# Altium PCB PCB_BLDC_DRV_Havoc_utlis_2025-07-22.pcbdoc (part 1 of 2)
Units mm, origin at the board's own origin, x right, y up, seen from the top; angles counter-clockwise.
Board outline 137.44 x 106.49 mm, 2 copper layers (Top Layer, Bottom Layer); 116 components, 98 nets, 405 pads, 307 vias.
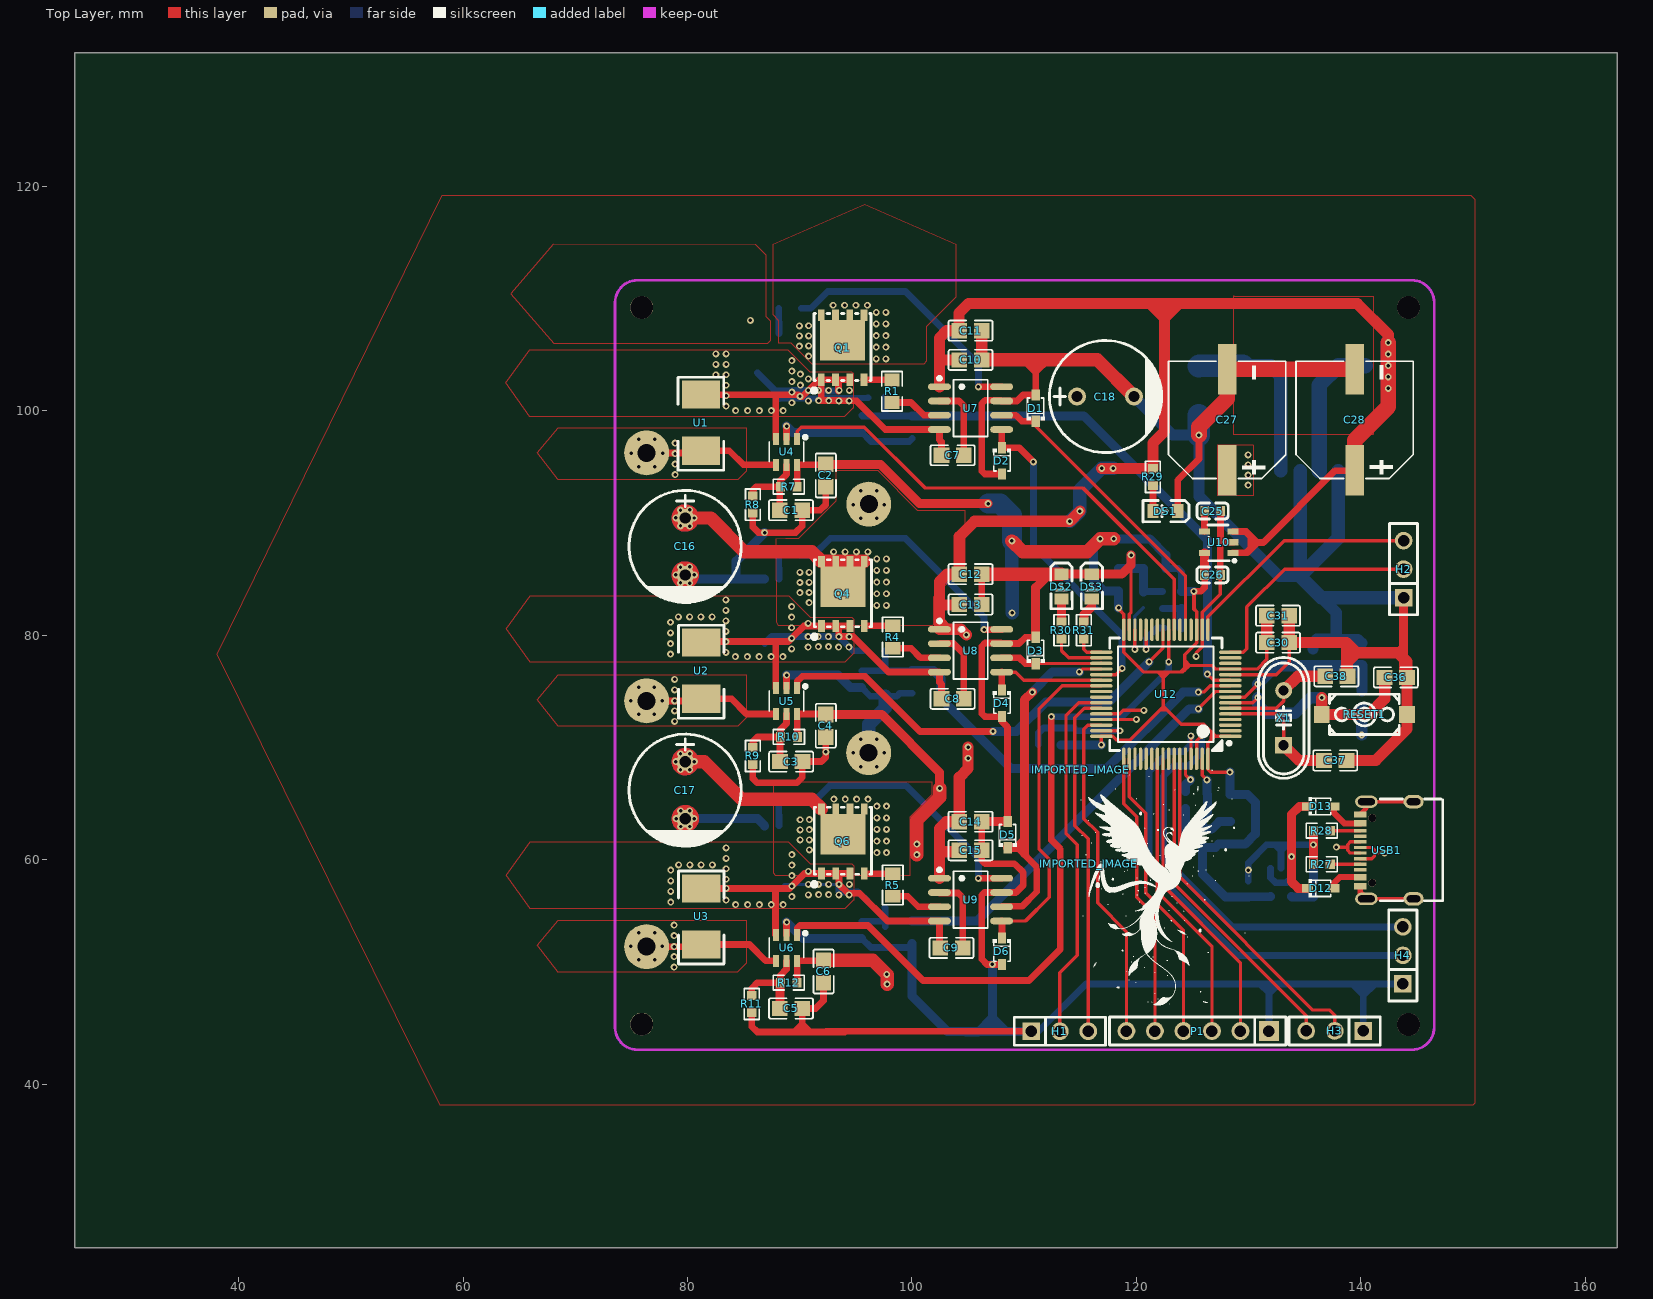
[diagram p0: Top Layer view]
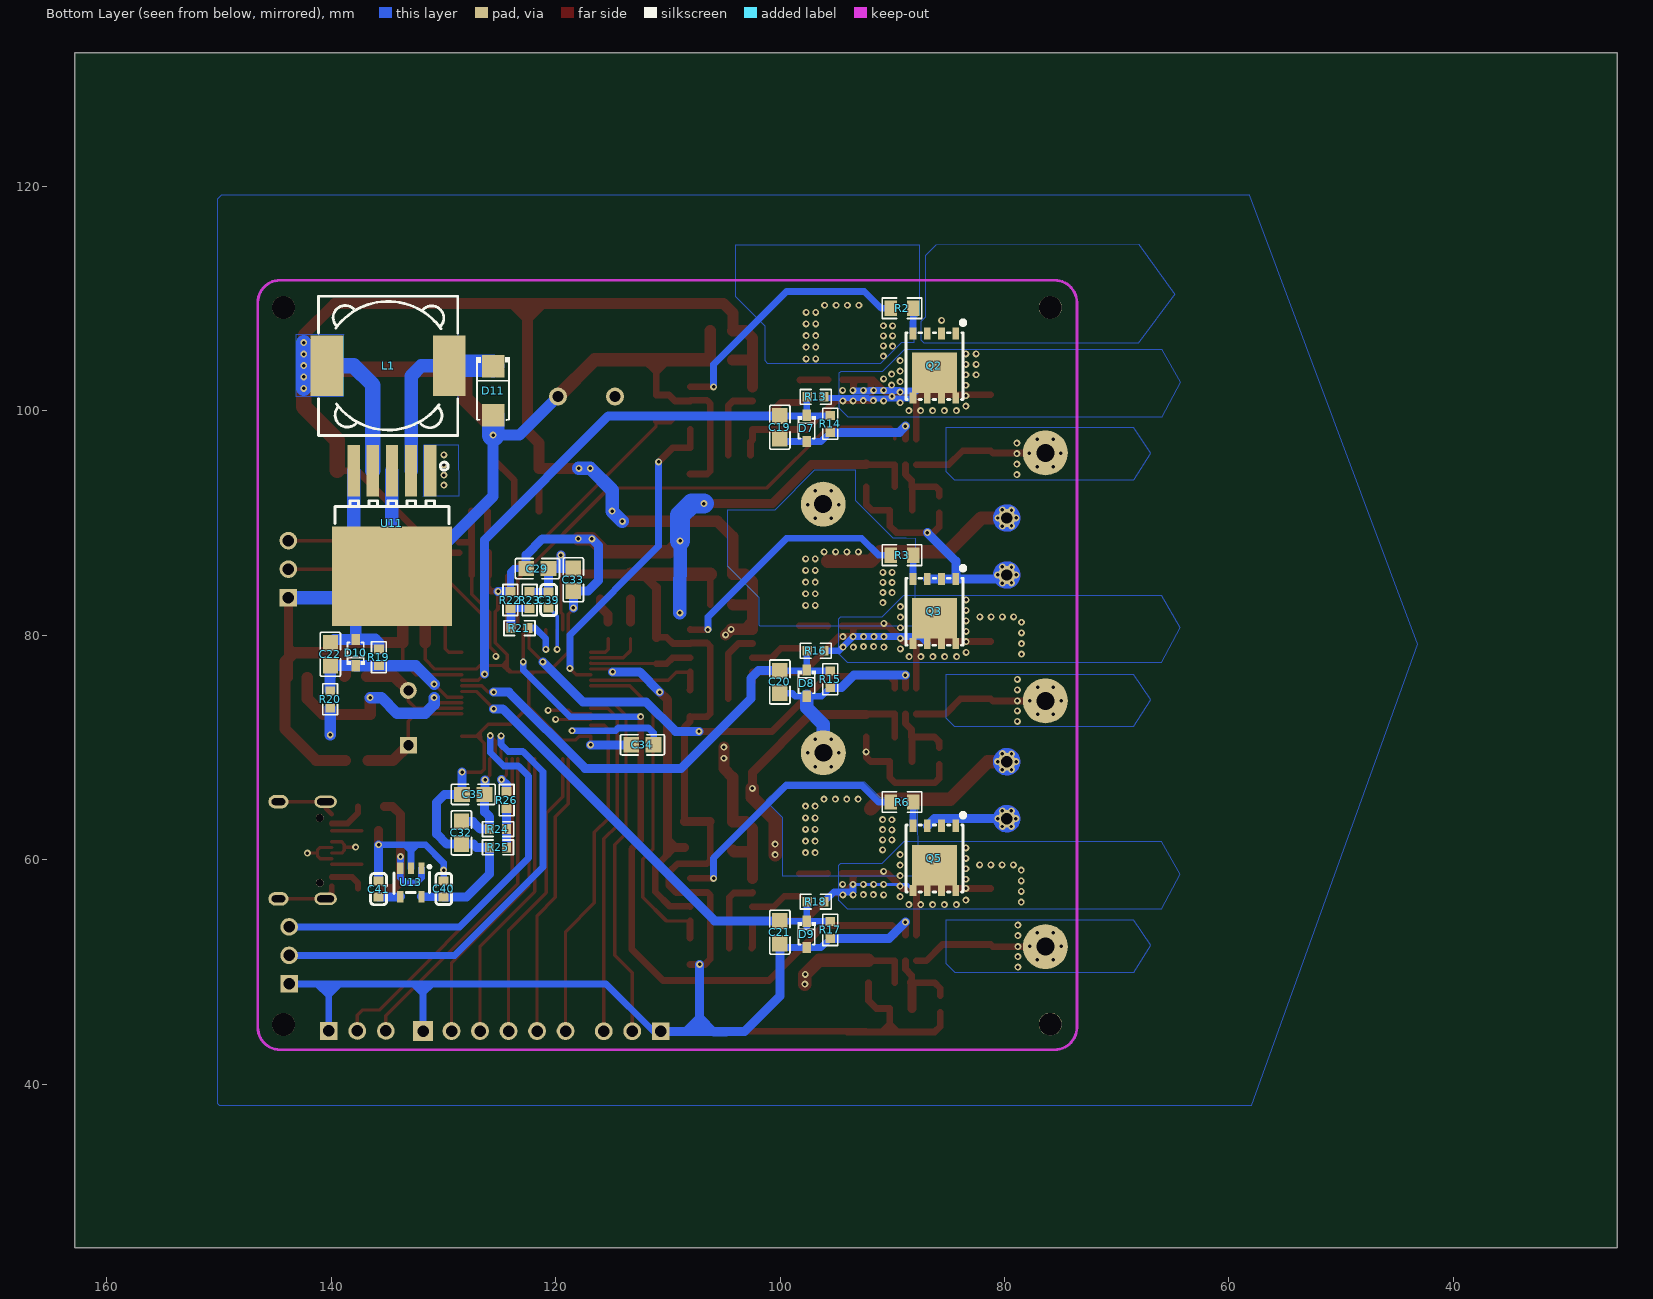
[diagram p1: Bottom Layer view, seen from below]

## Layer stack, top to bottom
Top Layer: signal copper (thickness not stored)
Dielectric: dielectric 0.32, FR-4, Dk 4.8
Bottom Layer: signal copper (thickness not stored)

## Board outline
162.84,25.4 25.4,25.4 25.4,131.89 162.84,131.89

## Components (designator, comment, footprint, x,y, rotation, side; value= is the part's Value field where it differs from the comment)
C1 "1uF" C0805#1 89.22,91.13 r180 top
C2 "100nF" C0805#1 92.32,94.23 r90 top
C3 "1uF" C0805#1 89.23,68.731 r180 top
C4 "100nF" C0805#1 92.32,71.93 r90 top
C5 "1uF" C0805#1 89.22,46.731 r180 top
C6 "100nF" C0805#1 92.12,50.031 r90 top
C7 "100nF" C0805#1 103.62,96.03 r0 top
C8 "100nF" C0805#1 103.62,74.33 r0 top
C9 "100nF" C0805#1 103.52,52.131 r0 top
C10 "1nf" C0805#1 105.22,104.53 r180 top
C11 "10uF" C0805#1 105.22,107.13 r180 top
C12 "10uF" C0805#1 105.22,85.43 r180 top
C13 "1nf" C0805#1 105.22,82.73 r180 top
C14 "1nf" C0805#1 105.22,63.371 r180 top
C15 "10uF" C0805#1 105.22,60.831 r180 top
C16 "470uF" CAP-TH_BD10.0-P5.00-D1.0-FD 79.79,87.9 r270 top
C17 "470uF" CAP-TH_BD10.0-P5.00-D1.0-FD 79.79,66.18 r270 top
C18 "470uF" CAP-TH_BD10.0-P5.00-D1.0-FD 117.24,101.26 r0 top
C19 "1nf" C0805#2 100.02,98.53 r270 bottom
C20 "1nf" C0805#2 100.02,75.83 r270 bottom
C21 "1nf" C0805#2 100.02,53.531 r270 bottom
C22 "1nf" C0805#2 140.07,78.29 r90 bottom
C25 "470pF" C0603#1 126.79,91.06 r180 top
C26 "2.2uF" C0603#1 126.78,85.37 r180 top
C27 "220uF" CAP-SMD_BD10.0-L10.3-W10.3-LS11.3-FD 128.09,99.18 r90 top
C28 "220uF" CAP-SMD_BD10.0-L10.3-W10.3-LS11.3-FD 139.45,99.19 r90 top
C29 "100nf" C0805#2 121.62,85.93 r0 bottom
C30 "100nf" C0805#1 132.62,79.33 r0 top
C31 "1uf" C0805#1 132.62,81.73 r0 top
C32 "100nf" C0805#2 128.39,62.38 r270 bottom
C33 "100nf" C0805#2 118.42,84.93 r270 bottom
C34 "100nf" C0805#2 112.26,70.23 r0 bottom
C35 "100nf" C0805#2 127.33,65.811 r0 bottom
C36 "100nf" C0805#1 143.12,76.23 r0 top
C37 "20pf" C0805#1 137.72,68.83 r0 top
C38 "20pf" C0805#1 137.82,76.33 r0 top
C39 "4.7uF" C0603#2 120.62,83.13 r90 bottom
C40 "2.2uF" C0603#2 129.97,57.381 r90 bottom
C41 "470pF" C0603#2 135.77,57.371 r90 bottom
D1 "BZT52C3V3S-7-F" SOD-323_L1.8-W1.3-LS2.5-RD#1 111.02,100.23 r90 top
D2 "BZT52C3V3S-7-F" SOD-323_L1.8-W1.3-LS2.5-RD#1 108.02,95.53 r270 top
D3 "BZT52C3V3S-7-F" SOD-323_L1.8-W1.3-LS2.5-RD#1 111.02,78.63 r90 top
D4 "BZT52C3V3S-7-F" SOD-323_L1.8-W1.3-LS2.5-RD#1 108.02,73.93 r270 top
D5 "BZT52C3V3S-7-F" SOD-323_L1.8-W1.3-LS2.5-RD#1 108.52,62.231 r90 top
D6 "BZT52C3V3S-7-F" SOD-323_L1.8-W1.3-LS2.5-RD#1 108.02,51.831 r270 top
D7 "BZT52C3V3S-7-F" SOD-323_L1.8-W1.3-LS2.5-RD#2 97.62,98.43 r90 bottom
D8 "BZT52C3V3S-7-F" SOD-323_L1.8-W1.3-LS2.5-RD#2 97.62,75.73 r90 bottom
D9 "BZT52C3V3S-7-F" SOD-323_L1.8-W1.3-LS2.5-RD#2 97.62,53.331 r90 bottom
D10 "BZT52C3V3S-7-F" SOD-323_L1.8-W1.3-LS2.5-RD#2 137.81,78.45 r270 bottom
D11 "SS34-SMA(DO-214AC)" SMA_L4.3-W2.6-LS5.2-RD 125.57,101.78 r90 bottom
D12 "SD103AWS" SOD-323_L1.8-W1.3-LS2.5-RD#1 136.42,57.431 r0 top
D13 "SD103AWS" SOD-323_L1.8-W1.3-LS2.5-RD#1 136.42,64.731 r0 top
DS1 "LED0805-1" LED0805-RD 122.58,91.05 r180 top
DS2 "LED0805-1" LED0805-RD 113.32,84.33 r270 top
DS3 "LED0805-1" LED0805-RD 116.02,84.33 r270 top
H1 "PM254V-11-03-H85" HDR-TH_3P-P2.54-V-F 113.17,44.701 r0 top
H2 "PM254V-11-03-H85" HDR-TH_3P-P2.54-V-F 143.81,85.88 r90 top
H3 "PM254V-11-03-H85" HDR-TH_3P-P2.54-V-F 137.67,44.731 r180 top
H4 "PM254V-11-03-H85" HDR-TH_3P-P2.54-V-F 143.74,51.461 r90 top
IMPORTED_IMAGE "IMPORTED_IMAGE" IMPORTED_IMAGE 115.055,68.008 r0 top
IMPORTED_IMAGE "IMPORTED_IMAGE" IMPORTED_IMAGE 115.753,59.622 r0 top
L1 "33uH" IND-SMD_L12.3-W12.3 134.92,104 r0 bottom
P1 "Header-Female-2.54_1x6" HDR-TH_6P-P2.54-V-F 125.46,44.721 r180 top
Q1 "ISC019N03L5SATMA1" PG-TDSON-8_L5.9-W5.1-P1.27-LS6.1-BL#1 93.82,105.63 r0 top
Q2 "ISC019N03L5SATMA1" PG-TDSON-8_L5.9-W5.1-P1.27-LS6.1-BL#2 86.24,104.01 r180 bottom
Q3 "ISC019N03L5SATMA1" PG-TDSON-8_L5.9-W5.1-P1.27-LS6.1-BL#2 86.24,82.13 r180 bottom
Q4 "ISC019N03L5SATMA1" PG-TDSON-8_L5.9-W5.1-P1.27-LS6.1-BL#1 93.84,83.69 r0 top
Q5 "ISC019N03L5SATMA1" PG-TDSON-8_L5.9-W5.1-P1.27-LS6.1-BL#2 86.239,60.131 r180 bottom
Q6 "ISC019N03L5SATMA1" PG-TDSON-8_L5.9-W5.1-P1.27-LS6.1-BL#1 93.84,61.631 r0 top
R1 "4.7Ω" R0805#1 98.22,101.73 r90 top
R2 "4.7Ω" R0805#2 89.12,109.13 r0 bottom
R3 "4.7Ω" R0805#2 89.12,87.13 r0 bottom
R4 "4.7Ω" R0805#1 98.282,79.83 r90 top
R5 "4.7Ω" R0805#1 98.282,57.731 r90 top
R6 "4.7Ω" R0805#2 89.12,65.131 r0 bottom
R7 "10kΩ" R0603#1 89.02,93.23 r0 top
R8 "10kΩ" R0603#1 85.82,91.63 r90 top
R9 "10kΩ" R0603#1 85.82,69.23 r90 top
R10 "10kΩ" R0603#1 89.03,70.931 r0 top
R11 "10kΩ" R0603#1 85.72,47.131 r90 top
R12 "10kΩ" R0603#1 89.02,49.031 r0 top
R13 "10kΩ" R0603#2 96.82,101.23 r0 bottom
R14 "1kΩ" R0603#2 95.52,98.83 r270 bottom
R15 "1kΩ" R0603#2 95.52,76.07 r270 bottom
R16 "10kΩ" R0603#2 96.819,78.61 r0 bottom
R17 "1kΩ" R0603#2 95.52,53.731 r270 bottom
R18 "10kΩ" R0603#2 96.819,56.251 r0 bottom
R19 "1kΩ" R0603#2 135.74,78.03 r90 bottom
R20 "10kΩ" R0603#2 140.09,74.28 r90 bottom
R21 "10kΩ" R0603#2 123.22,80.63 r180 bottom
R22 "0Ω" R0603#2 124.02,83.13 r90 bottom
R23 "0Ω" R0603#2 122.32,83.13 r90 bottom
R24 "0Ω" R0603#2 125.12,62.72 r0 bottom
R25 "0Ω" R0603#2 125.13,61.08 r0 bottom
R26 "10kΩ" R0603#2 124.37,65.301 r90 bottom
R27 "10kΩ" R0603#1 136.52,59.58 r180 top
R28 "10kΩ" R0603#1 136.52,62.58 r180 top
R29 "10kΩ" R0603#1 121.47,94.1 r270 top
R30 "10kΩ" R0603#1 113.32,80.43 r90 top
R31 "10kΩ" R0603#1 115.32,80.43 r90 top
RESET1 "3X6X4.3MM 2PIN BUTTON" KEY-SMD_2P-L6.2-W3.6-LS8.0 140.32,72.93 r180 top
U1 "2mΩ" RES-SMD_L6.4-W3.2_LRS2512 81.19,98.93 r90 top
U2 "2mΩ" RES-SMD_L6.4-W3.2_LRS2512 81.22,76.83 r90 top
U3 "2mΩ" RES-SMD_L6.4-W3.2_LRS2512 81.22,54.931 r90 top
U4 "INA181A1IDBVR" SOT-23-6_L2.9-W1.6-P0.95-LS2.8-TL 88.82,96.33 r270 top
U5 "INA181A1IDBVR" SOT-23-6_L2.9-W1.6-P0.95-LS2.8-TL 88.82,74.13 r270 top
U6 "INA181A1IDBVR" SOT-23-6_L2.9-W1.6-P0.95-LS2.8-TL 88.82,52.131 r270 top
U7 "UCC27282DR" SOIC-8_L4.9-W3.9-P1.27-LS6.0-BL 105.22,100.23 r270 top
U8 "UCC27282DR" SOIC-8_L4.9-W3.9-P1.27-LS6.0-BL 105.22,78.61 r270 top
U9 "UCC27282DR" SOIC-8_L4.9-W3.9-P1.27-LS6.0-BL 105.22,56.431 r270 top
U10 "MIC5219-3.3YM5" SOT-23-5_L3.0-W1.7-P0.95-LS2.8-TL#1 127.34,88.28 r180 top
U11 "LM2596HVS-12" PG-TO-263-5_L10.0-W9.0-P1.70-LS15.0-BR 134.58,89.95 r270 bottom
U12 "STM32F446RET6" LQFP-64_L10.0-W10.0-P0.50-LS12.0-BL 122.62,74.73 r90 top
U13 "MIC5219-3.3YM5" SOT-23-5_L3.0-W1.7-P0.95-LS2.8-TL#2 132.89,57.961 r90 bottom
USB1 "TYPE-C 16PIN 2MD(073)" USB-C-SMD_TYPE-C-6PIN-2MD-073 142.32,60.831 r90 top
X1 "25MHz" HC-49US_L11.5-W4.5-P4.88 133.12,72.63 r90 top

## Footprints (in the part's own frame and the unit in brackets; to place one, negate y for a bottom-side part, rotate by r counter-clockwise, add the part's x,y. Pads: shape width x height; smd on the part's side, far side on the other; paste and mask are expansions set on the pad)
C0603#1 [mm]
  rect 0.8x0.9 smd paste+0 mask+0.051: 1(-0.7,0) 2(0.7,0)
  silkscreen extent -1.39,-0.71 1.39,0.71
C0603#2 [mm]
  rect 0.8x0.9 smd paste+0 mask+0.051: 1(0.7,0) 2(-0.7,0)
  silkscreen extent -1.39,-0.71 1.39,0.71
C0805#1 [mm]
  rect 1.41x1.35 smd paste-100 mask+0.051: 1(-1,0) 2(1,0)
  silkscreen extent -1.96,-0.9 1.96,0.9
C0805#2 [mm]
  rect 1.41x1.35 smd paste-100 mask+0.051: 1(1,0) 2(-1,0)
  silkscreen extent -1.96,-0.9 1.96,0.9
CAP-SMD_BD10.0-L10.3-W10.3-LS11.3-FD [mm]
  rect 4.5x1.65 smd paste+0 mask+0.051: 1(-4.5,0) 2(4.5,0)
  silkscreen extent -5.23,-5.23 5.23,5.23
CAP-TH_BD10.0-P5.00-D1.0-FD [mm]
  round 1.6 hole 1 paste+0 mask+0.051: 1(-2.54,0) 2(2.54,0)
  silkscreen extent -5,-5 5.08,5
HC-49US_L11.5-W4.5-P4.88 [mm]
  rect 1.5x1.5 hole 0.9 paste+0 mask+0.051: 1(-2.44,0)
  round 1.5 hole 0.9 paste+0 mask+0.051: 2(2.44,0)
  silkscreen extent -5.39,-2.25 5.39,2.25
HDR-TH_3P-P2.54-V-F [mil]
  rect 62x62 hole 40.16 paste+0 mask+2: 1(-100,0)
  round 62 hole 40.16 paste+0 mask+2: 2(0,0) 3(100,0)
  silkscreen extent -160,-49 160,49
HDR-TH_6P-P2.54-V-F [mm]
  rect 1.8x1.8 hole 1.02 paste+0 mask+0.051: 1(-6.35,0)
  round 1.6 hole 1.02 paste+0 mask+0.051: 2(-3.81,0) 3(-1.27,0) 4(1.27,0) 5(3.81,0) 6(6.35,0)
  silkscreen extent -7.87,-1.25 7.87,1.25
IMPORTED_IMAGE [mm]
  silkscreen extent 0,-21 15,0
IND-SMD_L12.3-W12.3 [mm]
  rect 2.9x5.4 smd paste+0 mask+0.051: 1(5.45,0) 2(-5.45,0)
  silkscreen extent -6.2,-6.2 6.2,6.2
KEY-SMD_2P-L6.2-W3.6-LS8.0 [mm]
  rect 1.4x1.5 smd paste+0 mask+0.051: 1(-3.8,0) 2(3.8,0)
  silkscreen extent -3.1,-1.8 3.1,1.8
LED0805-RD [mm]
  rect 1x1.25 smd paste+0 mask+0.051: 1(-1.1,0) 2(1.1,0)
  silkscreen extent -2.1,-0.95 1.98,0.96
LQFP-64_L10.0-W10.0-P0.50-LS12.0-BL [mm]
  oval 0.3x2 smd paste+0 mask+0.051: 1(-3.75,-5.75) 2(-3.25,-5.75) 3(-2.75,-5.75) 4(-2.25,-5.75) 5(-1.75,-5.75) 6(-1.25,-5.75) 7(-0.75,-5.75) 8(-0.25,-5.75) 9(0.25,-5.75) 10(0.75,-5.75) 11(1.25,-5.75) 12(1.75,-5.75) 13(2.25,-5.75) 14(2.75,-5.75) 15(3.25,-5.75) 16(3.75,-5.75) 33(3.75,5.75) 34(3.25,5.75) 35(2.75,5.75) 36(2.25,5.75) 37(1.75,5.75) 38(1.25,5.75) 39(0.75,5.75) 40(0.25,5.75) 41(-0.25,5.75) 42(-0.75,5.75) 43(-1.25,5.75) 44(-1.75,5.75) 45(-2.25,5.75) 46(-2.75,5.75) 47(-3.25,5.75) 48(-3.75,5.75)
  oval 2x0.3 smd paste+0 mask+0.051: 17(5.75,-3.75) 18(5.75,-3.25) 19(5.75,-2.75) 20(5.75,-2.25) 21(5.75,-1.75) 22(5.75,-1.25) 23(5.75,-0.75) 24(5.75,-0.25) 25(5.75,0.25) 26(5.75,0.75) 27(5.75,1.25) 28(5.75,1.75) 29(5.75,2.25) 30(5.75,2.75) 31(5.75,3.25) 32(5.75,3.75) 49(-5.75,3.75) 50(-5.75,3.25) 51(-5.75,2.75) 52(-5.75,2.25) 53(-5.75,1.75) 54(-5.75,1.25) 55(-5.75,0.75) 56(-5.75,0.25) 57(-5.75,-0.25) 58(-5.75,-0.75) 59(-5.75,-1.25) 60(-5.75,-1.75) 61(-5.75,-2.25) 62(-5.75,-2.75) 63(-5.75,-3.25) 64(-5.75,-3.75)
  silkscreen extent -5,-5.79 5,5
PG-TDSON-8_L5.9-W5.1-P1.27-LS6.1-BL#1 [mm]
  rect 0.6x1.1 smd paste-100 mask+0.051: 1(-1.905,-2.875) 2(-0.635,-2.875) 3(0.635,-2.875) 4(1.905,-2.875)
  rect 0.6x1 smd paste-100 mask+0.051: 5(1.905,2.875) 6(0.635,2.875) 7(-0.635,2.875) 8(-1.905,2.875)
  rect 4x3.6 smd paste-100 mask+0.051: 8(0,0.638)
  silkscreen extent -2.67,-3.96 2.54,3.03
PG-TDSON-8_L5.9-W5.1-P1.27-LS6.1-BL#2 [mm]
  rect 0.6x1.1 smd paste-100 mask+0.051: 1(1.905,2.875) 2(0.635,2.875) 3(-0.635,2.875) 4(-1.905,2.875)
  rect 0.6x1 smd paste-100 mask+0.051: 5(-1.905,-2.875) 6(-0.635,-2.875) 7(0.635,-2.875) 8(1.905,-2.875)
  rect 4x3.6 smd paste-100 mask+0.051: 8(0,-0.638)
  silkscreen extent -2.54,-3.03 2.67,3.96
PG-TO-263-5_L10.0-W9.0-P1.70-LS15.0-BR [mm]
  rect 4.6x1.1 smd paste+0 mask+0.051: 1(-4.699,3.4) 2(-4.699,1.7) 3(-4.699,0) 4(-4.699,-1.7) 5(-4.699,-3.4)
  rect 8.89x10.668 smd paste+0 mask+0.051: 6(4.699,0)
  silkscreen extent -5.47,-5.08 0.02,5.08
R0603#1 [mm]
  rect 0.806x0.864 smd paste-100 mask+0.051: 1(-0.753,0) 2(0.753,0)
  silkscreen extent -1.39,-0.66 1.39,0.66
R0603#2 [mm]
  rect 0.806x0.864 smd paste-100 mask+0.051: 1(0.753,0) 2(-0.753,0)
  silkscreen extent -1.39,-0.66 1.39,0.66
R0805#1 [mm]
  rect 1.133x1.377 smd paste-100 mask+0.051: 1(-1,0) 2(1,0)
  silkscreen extent -1.76,-0.92 1.76,0.92
R0805#2 [mm]
  rect 1.133x1.377 smd paste-100 mask+0.051: 1(1,0) 2(-1,0)
  silkscreen extent -1.76,-0.92 1.76,0.92
RES-SMD_L6.4-W3.2_LRS2512 [mm]
  rect 2.5x3.4 smd paste+0 mask+0.051: 1(-2.5,0) 2(2.5,0)
  silkscreen extent -4.23,-2.03 4.06,2.03
SMA_L4.3-W2.6-LS5.2-RD [mm]
  rect 2x2 smd paste+0 mask+0.051: 1(2.2,0) 2(-2.2,0)
  silkscreen extent -2.6,-1.5 2.98,1.5
SOD-323_L1.8-W1.3-LS2.5-RD#1 [mm]
  rect 1x0.75 smd paste+0 mask+0.051: 1(-1.173,0) 2(1.173,0)
  silkscreen extent -1.08,-0.8 0.9,0.8
SOD-323_L1.8-W1.3-LS2.5-RD#2 [mm]
  rect 1x0.75 smd paste+0 mask+0.051: 1(1.173,0) 2(-1.173,0)
  silkscreen extent -0.9,-0.8 1.08,0.8
SOIC-8_L4.9-W3.9-P1.27-LS6.0-BL [mm]
  oval 0.588x2.045 smd paste+0 mask+0.051: 1(-1.905,-2.773) 2(-0.635,-2.773) 3(0.635,-2.773) 4(1.905,-2.773) 5(1.905,2.773) 6(0.635,2.773) 7(-0.635,2.773) 8(-1.905,2.773)
  silkscreen extent -2.8,-2.92 2.53,1.52
SOT-23-5_L3.0-W1.7-P0.95-LS2.8-TL#1 [mm]
  rect 1x0.55 smd paste+0 mask+0.051: 1(-1.271,0.95) 2(-1.271,0) 3(-1.271,-0.95) 4(1.271,-0.95) 5(1.271,0.95)
  silkscreen extent -1.52,-1.52 0.97,1.78
SOT-23-5_L3.0-W1.7-P0.95-LS2.8-TL#2 [mm]
  rect 1x0.55 smd paste+0 mask+0.051: 1(1.271,-0.95) 2(1.271,0) 3(1.271,0.95) 4(-1.271,0.95) 5(-1.271,-0.95)
  silkscreen extent -0.97,-1.78 1.52,1.52
SOT-23-6_L2.9-W1.6-P0.95-LS2.8-TL [mm]
  rect 1.072x0.532 smd paste+0 mask+0.051: 1(-1.149,0.95) 2(-1.149,0) 3(-1.149,-0.95) 4(1.149,-0.95) 5(1.149,0) 6(1.149,0.95)
  silkscreen extent -1.45,-1.54 0.89,1.82
USB-C-SMD_TYPE-C-6PIN-2MD-073 [mm]
  rect 0.55x1.1 smd paste-100 mask+0.05: 1(-3.2,2.375) 2(-2.4,2.375) 11(2.4,2.375) 12(3.2,2.375)
  rect 0.3x1.1 smd paste-100 mask+0.05: 3(-1.75,2.375) 4(-1.25,2.375) 5(-0.75,2.375) 6(-0.25,2.375) 7(0.25,2.375) 8(0.75,2.375) 9(1.25,2.375) 10(1.75,2.375)
  oval 1.2x1.8 hole 0.6 slot 1.2 at 90 deg paste+0 mask+0.05: 13(-4.325,-2.375) 14(4.325,-2.375)
  oval 1.1x2 hole 0.6 slot 1.5 at 90 deg paste+0 mask+0.05: 13(-4.325,1.825) 14(4.325,1.825)
  round 0.7 hole 0.7 unplated paste+0: ""(-2.89,1.305) ""(2.89,1.305)
  silkscreen extent -4.5,-4.97 4.57,0.6

## Free pads (board coordinates)
  round 4 hole 1.6 paste+0 mask+0.051: 2(76.35,52.241) 2(76.35,74.14) 2(76.35,96.24) 2(96.14,69.521) 2(96.15,91.671)
  round 2.032 hole 2.032 unplated paste+0: ""(75.92,45.33) ""(75.92,109.2) ""(144.24,45.298) ""(144.24,109.2)

## Via types
v1: diameter 0.62, hole 0.31, Top Layer to Bottom Layer, tented both sides, 307 vias

## Nets (pads, with @x,y where several pads share a name; then routed paths per layer and width w, separated by ;. In a path a pad name is that pad's centre, name@x,y a point inside that pad or via, vN(x,y) a via of type N, cw(c..) or ccw(c..) an arc to the next point about the centre after c; other vN are vias at no path point)
3V3: C2.2 C4.2 C6.2 C26.2 C29.1 C30.1 C31.1 C32.1 C33.1 C34.1 C35.1 C40.2 R7.2 R10.2 R12.2 R22.1 R25.1 U4.6 U5.6 U6.6 U10.5 U12.1 U12.13 U12.19 U12.32 U12.48 U12.64 U13.5 | length 223.2
  Top Layer w0.3: v1(116.87,70.22) 116.87,70.65 ; U12.48@116.87,70.98 117.909,70.98 118.241,70.65 119.42,70.65 122.407,73.637 122.407,76.721 ; v1(116.87,70.22) U12.48@116.87,70.98 ; v1(118.42,82.43) 118.42,82.33 118.87,81.88 U12.32@118.87,80.48 ; U12.32@118.87,80.48 118.869,78.481 120.629,76.721 124.149,76.721 124.718,77.29 124.881,77.29 ; 121.43,76.721 121.897,76.721 122.407,76.211 ; 122.12,73.35 122.707,73.353 ; 122.407,73.805 122.407,73.652 124,72.06 125.991,72.06 127.07,70.98 128.371,70.98 126.969,70.98 126.369,70.381 U12.64@126.37,68.981 ; 122.407,76.207 122.92,76.721 123.286,76.721 ; 123.968,76.721 124.545,77.297 124.54,77.519 ; 124.301,76.872 124.32,77.871 ; 124.315,77.29 125.506,77.29 ; U12.19@125.371,80.48 125.371,79.312 124.32,78.26 124.32,77.739 124.769,77.29 126.771,77.29 127.081,76.98 U12.13@128.371,76.98 ; U12.64@126.37,68.981 126.37,68.03 126.61,67.79 v1(128.32,67.79) ; 126.674,70.686 126.697,71.354 ; U12.13@128.37,76.98 130.77,76.981 131.62,77.831 C30.1@131.62,79.331
  Top Layer w0.34: v1(125.12,83.9) 125.12,82.332 125.371,82.08 U12.19@125.371,80.48
  Top Layer w0.6: R12.2@89.773,49.031 89.771,50.98 92.12,50.98 C6.2@92.12,51.031 ; R7.2@89.773,93.23 89.771,95.182 92.271,95.181 C2.2@92.32,95.23 ; R10.2@89.783,70.931 89.771,72.982 92.269,72.982 C4.2@92.32,72.931 ; v1(125.12,83.9) 125.729,83.901 126.08,84.249 C26.2@126.08,85.37
  Top Layer w0.8: C4.2@92.321,72.931 97.289,72.931 102.47,67.75 v1(102.47,66.341) ; C2.2@92.321,95.23 92.351,95.199 97.21,95.199 100.69,91.72 v1(106.79,91.721) ; U10.5@126.068,87.33 126.08,87.319 C26.2@126.08,85.37
  Top Layer w1: C30.1@131.62,79.331 C31.1@131.62,81.73
  Top Layer w1.2: C6.2@92.12,51.031 96.49,51.031 v1(97.75,49.771) 97.78,49.741 v1(97.78,48.9) ; v1@100.431,60.45 100.431,63.51 102.47,65.549 v1(102.47,66.341) ; v1(108.91,88.39) 109.88,87.42 115.62,87.42 116.79,88.59 v1(117.98,88.59)
  Mid-Layer 1 w1.2: v1(102.47,66.341) 102.96,66.83 106.25,66.83 108.92,69.5 v1(108.92,81.991)
  Mid-Layer 2 w1.2: v1(97.78,48.9) 97.779,54.712 100.431,57.361 v1@100.431,61.372
  Bottom Layer w0.6: C29.1@122.62,85.93 123.72,85.931 124.02,85.631 R22.1@124.02,83.884
  Bottom Layer w0.8: C34.1@113.26,70.23 116.86,70.231 v1(116.87,70.22) ; C33.1@118.42,83.93 117.119,83.929 116.159,84.889 116.159,87.969 v1(116.77,88.58) 121.17,88.58 122.62,87.13 C29.1@122.62,85.93 ; v1(118.42,82.43) C33.1@118.42,83.93 ; R22.1@124.02,83.884 v1(125.12,83.9) ; R25.1@125.883,61.08 127.03,61.08 127.33,61.38 C32.1@128.39,61.38 ; R25.1@125.884,61.079 125.882,58.727 127.929,56.68 129.971,56.68 U13.5@131.94,56.689 ; v1(128.32,67.79) 128.33,67.78 C35.1@128.33,65.811 ; C35.1@128.33,65.811 129.88,65.812 130.601,65.09 130.601,62.291 129.689,61.382 C32.1@128.39,61.38
  Bottom Layer w1.2: v1(108.91,88.39) v1(108.92,81.991)
  Bottom Layer w1.8: v1(106.79,91.721) 107.87,91.721 108.91,90.68 v1(108.91,88.39)
  other v1: 100.43,60.451 100.43,61.371
12V: C10.2 C11.2 C12.2 C13.2 C14.2 C15.2 C28.1 L1.1 R29.1 U7.1 U8.1 U9.1 U10.1 U10.3 U11.4 | length 193.3
  Top Layer w0.6: 130.2,88.26 131.31,88.26 137.71,94.661 139.42,94.661 C28.1@139.45,94.691 ; 130.764,88.26 129.781,89.23 128.612,89.23 129.73,89.23 130.2,88.76 130.2,87.77 129.76,87.33 128.612,87.33 129.87,87.33 130.8,88.26
  Top Layer w1: U9.1@102.447,58.336 102.448,62.758 103.06,63.371 104.221,63.371 104.221,67.33 105,68.11 v1(105,70.021) ; 102.448,60.703 104.092,60.703 C15.2@104.22,60.831 ; 102.448,81.192 103.124,80.516 v1(104.365,80.516) ; 102.448,82.69 104.179,82.69 C13.2@104.22,82.73 ; U7.1@102.447,102.135 102.448,106.487 103.09,107.13 104.221,107.13 104.19,107.16 104.19,108.689 105.049,109.55 129.308,109.55 ; 102.448,104.473 102.505,104.53 C10.2@104.22,104.53 ; v1(104.85,80.03) v1(104.365,80.516) ; v1(114.97,91.05) 114.061,90.14 105.579,90.14 104.221,88.781 104.221,85.43 103.121,85.43 102.448,84.757 U8.1@102.447,80.515 v1(104.365,80.516) ; v1@116.91,94.86 v1(117.92,94.86) 117.927,94.854 R29.1@121.47,94.854 121.47,97.12 122.509,98.161 122.509,108.25 ; 119.542,109.55 121.208,109.55 122.509,108.25 ; 122.539,109.55 122.539,108.28 122.509,108.25 ; v1(142.44,106.06) 142.44,106.779 139.669,109.55 123.809,109.55 122.509,108.25
  Top Layer w1.4: C28.1@139.45,94.691 139.45,97.361 142.44,100.35 v1(142.44,106.06)
  Mid-Layer 1 w1: v1(104.365,80.516) v1(104.85,80.03) 105,79.88 v1(105,70.021) v1(105,69.03)
  Bottom Layer w1.2: v1@114.05,90.132 v1(114.97,91.05) 114.97,92.931 116.9,94.861 v1(117.92,94.86)
  Bottom Layer w1.4: U11.4@136.28,94.65 136.28,102.281 138,104 L1.1@140.37,104 ; v1(142.44,101.99) v1(142.44,106.06)
  other v1: 114.05,90.13 116.91,94.86 142.44,103.008 142.44,104.026 142.44,105.043
APH_CSENSE: U4.1 U12.23 | length 44.6
  Top Layer w0.3: U4.1@89.771,97.48 89.771,98.181 90.121,98.529 95.76,98.529 101.18,93.111 115.239,93.111 123.37,84.981 U12.23@123.37,80.48
BPH_CSENSE: U5.1 U12.25 | length 40.1
  Top Layer w0.3: v1(121.13,77.62) 121.13,77.641 122.37,78.881 U12.25@122.37,80.48
  Top Layer w0.6: U5.1@89.771,75.281 89.771,75.88 90.22,76.33 95.811,76.33 100.72,71.42 v1(107.22,71.421)
  Bottom Layer w0.8: v1(107.22,71.421) 109.31,71.421 111.92,74.031 117.54,74.031 v1(121.13,77.62)
C8_2: C8.2 U8.2 | length 6.6
  Top Layer w0.6: U8.2@102.447,79.245 103.705,79.246 104.619,78.331 C8.2@104.62,74.33
C9_2: C9.2 U9.2 | length 6.8
  Top Layer w0.6: U9.2@102.447,57.066 102.483,57.031 104.12,57.031 104.52,56.63 C9.2@104.52,52.131
C25_2: C25.2 U10.4 | length 1.8
  Top Layer w0.6: U10.4@126.068,89.23 126.068,91.039 C25.2@126.09,91.06
CAN_RX: H4.2 U12.61 | length 41.9
  Top Layer w0.3: v1(124.86,71.021) 124.86,68.991 U12.61@124.87,68.981
  Bottom Layer w0.6: v1(124.86,71.021) 124.86,70.271 124.22,69.631 122.92,69.631 121.12,67.83 121.12,59.33 128.99,51.461 H4.2@143.74,51.461
CAN_TX: H4.3 U12.62 | length 39.2
  Top Layer w0.3: U12.62@125.37,68.981 125.37,70.591 v1(125.82,71.041)
  Bottom Layer w0.6: v1(125.82,71.041) 125.82,69.53 124.62,68.33 123.32,68.33 122.42,67.43 122.42,60.131 128.55,54.001 H4.3@143.74,54.001
CPH_CSENSE: U6.1 U12.24 | length 64.2
  Top Layer w0.3: U12.24@122.87,80.48 122.87,77.631 v1(122.88,77.62)
  Top Layer w0.6: U6.1@89.771,53.279 89.771,53.881 90.019,54.13 96.09,54.13 100.99,49.23 110.421,49.23 113.22,52.029 113.22,60.93 112.42,61.73 v1(112.42,72.73)
  Bottom Layer w0.6: v1(112.42,72.73) 118.72,72.73 122.88,76.891 v1(122.88,77.62)
DS1_2: DS1.2 R29.2 | length 2.3
  Top Layer w0.6: R29.2@121.47,93.347 DS1.2@121.48,91.05
DS2_2: DS2.2 R30.2 | length 2
  Top Layer w0.8: R30.2@113.32,81.184 DS2.2@113.32,83.231
GND: C1.1 C2.1 C3.1 C4.1 C5.1 C6.1 C10.1 C11.1 C12.1 C13.1 C14.1 C15.1 C16.2 C17.2 C18.2 C19.1 C20.1 C21.1 C22.1 C25.1 C26.1 C27.2 C28.2 C29.2 C30.2 C31.2 C32.2 C33.2 C34.2 C35.2 C36.2 C37.2 C38.2 C39.1 C40.1 C41.1 D1.2 D2.2 D3.2 D4.2 D5.2 D6.2 D7.2 D8.2 D9.2 D10.2 D11.2 DS1.1 DS2.1 DS3.1 H1.1 H2.1 H3.1 H4.1 P1.1 pad.2@96.14,69.521 Q2.1 Q2.2 Q2.3 Q3.1 Q3.2 Q3.3 Q5.1 Q5.2 Q5.3 R8.1 R9.1 R11.1 R14.1 R15.1 R17.1 R19.1 R23.1 R24.1 R27.2 R28.2 RESET1.1 U4.2 U5.2 U6.2 U7.7 U8.7 U9.7 U10.2 U11.3 U11.5 U11.6 U12.12 U12.18 U12.31 U12.47 U12.63 U13.2 USB1.1 USB1.12 USB1.13 USB1.14 | length 870.9
  Top Layer w0.3: U12.47@116.87,71.481 v1(118.52,71.481) ; U12.31@119.37,80.48 119.37,81.881 119.52,82.03 v1(119.52,87.13) ; v1(125.32,78.11) 125.32,78.41 125.869,78.961 U12.18@125.87,80.48 125.869,82.04 127.479,83.65 C26.1@127.48,85.37 ; U12.63@125.87,68.981 125.87,67.5 v1(126.27,67.101) ; U12.12@128.37,76.481 132.47,76.481 133.62,77.631 C30.2@133.62,79.331 ; USB1.13@140.495,56.506 USB1.13@144.695,56.506 ; USB1.14@140.495,65.156 USB1.14@144.695,65.156
  Top Layer w0.4: USB1.12@139.945,64.031 140.495,64.58 USB1.14@140.495,65.156
  Top Layer w0.5: USB1.1@139.946,57.63 139.946,57.056 USB1.13@140.495,56.506
  Top Layer w0.6: R11.1@85.72,46.377 85.719,45.133 86.217,44.633 89.519,44.633 90.22,45.334 ; R9.1@85.821,68.476 85.821,67.231 86.212,66.84 89.727,66.84 90.22,67.33 C3.1@90.22,68.73 ; R8.1@85.821,90.876 85.821,89.632 86.319,89.131 v1(86.871,89.131) 89.621,89.131 90.22,89.731 C1.1@90.22,91.13 91.82,91.13 92.32,91.63 C2.1@92.32,93.23 ; U6.2@88.82,53.28 v1(88.82,54.431) ; U5.2@88.82,75.279 v1(88.82,76.43) ; U4.2@88.82,97.479 v1(88.82,98.63) ; 88.907,44.633 92.324,44.634 92.39,44.701 H1.1@110.63,44.701 ; C3.1@90.23,68.731 91.919,68.73 92.321,69.131 v1(92.321,69.597) C4.1@92.321,70.93 ; C6.1@92.12,49.031 92.12,47.43 91.419,46.731 C5.1@90.22,46.731 90.22,45.334 ; 94.002,44.631 90.923,44.631 90.22,45.334 ; C15.1@106.22,60.831 106.22,59.931 106.519,59.632 109.12,59.632 109.92,58.832 109.92,57.732 109.255,57.066 U9.7@107.992,57.066 106.456,57.066 106.22,56.83 106.22,51.13 106.692,50.658 v1(107.156,50.658) D6.2@108.02,50.658 ; C10.1@106.22,104.53 109.92,104.531 111.02,103.431 ; C15.1@106.22,60.831 C14.1@106.22,63.371 ; C13.1@106.22,82.73 C12.1@106.22,85.43 ; D4.2@108.02,72.738 106.491,72.738 106.219,73.01 106.219,79.009 106.519,79.309 107.926,79.309 U8.7@107.992,79.245 109.534,79.246 110.093,79.802 D3.2@111.02,79.802 ; D4.2@108.02,72.758 108.02,72.299 108.521,71.798 D5.2@108.521,63.404 ; D2.2@108.02,94.358 106.491,94.359 106.22,94.63 106.22,100.63 106.519,100.93 107.926,100.93 U7.7@107.992,100.865 109.354,100.866 109.892,101.402 D1.2@111.02,101.403 111.02,103.431 ; 111.028,104.531 111.02,103.431 ; 113.669,104.531 112.12,104.531 111.02,103.431 ; DS1.1@123.68,91.05 123.68,93.81 125.569,95.7 v1(125.569,97.828) ; C26.1@127.48,85.37 C25.1@127.49,91.06 ; 127.484,88.288 U10.2@128.612,88.28
  Top Layer w0.8: C14.1@106.22,63.371 106.252,63.403 D5.2@108.52,63.403 ; D3.2@111.02,79.802 111.02,84.232 112.219,85.43 DS2.1@113.32,85.431 ; DS2.1@113.32,85.431 DS3.1@116.02,85.431 ; DS3.1@116.02,85.431 118.691,85.43 119.519,86.261 v1(119.52,87.13) ; R27.2@135.767,59.58 135.77,59.584 v1(135.77,61.321) 135.77,62.577 R28.2@135.767,62.58 ; 143.319,78.43 143.809,78.92 H2.1@143.81,83.34 ; 143.809,80.16 143.809,76.231 C36.2@144.12,76.23 ; v1@80.611,63.641 ccw(c79.79,63.641) v1@80.611,63.641 ; v1(80.611,85.36) ccw(c79.79,85.36) v1(80.611,85.36)
  Top Layer w1: C10.1@106.22,104.53 C11.1@106.22,107.13 ; C30.2@133.62,79.33 138.719,79.332 ; C30.2@133.62,79.331 C31.2@133.62,81.73 ; C37.2@138.72,68.83 141.32,68.832 144.119,71.631 RESET1.1@144.12,72.931 ; C38.2@138.82,76.33 138.82,77.63 139.621,78.43 ; C38.2@138.82,76.33 138.719,76.431 138.719,79.332 ; C36.2@144.12,76.23 144.119,77.63 143.319,78.43 139.621,78.43 ; RESET1.1@144.12,72.931 C36.2@144.12,76.23 ; 138.719,79.332 139.621,78.43
  Top Layer w1.2: C12.1@106.22,85.43 DS2.1@113.32,85.431 ; C10.1@106.22,104.53 116.51,104.53 C18.2@119.78,101.26
  Top Layer w1.4: v1(125.569,97.828) 125.569,98.57 128.089,101.09 C27.2@128.09,103.68 C28.2@139.45,103.691
  Mid-Layer 1 w0.8: v1@80.611,63.641 ccw(c79.79,63.641) v1@80.611,63.641 ; v1(80.611,85.36) ccw(c79.79,85.36) v1(80.611,85.36)
  Mid-Layer 2 w0.6: v1(85.59,108.05) 80.65,108.05 78.93,106.33 78.93,102.44 83.57,97.8 83.57,92.433 v1(86.871,89.131) ; v1(118.52,71.481) 118.52,73.22 120.3,75 122.21,75 v1(125.32,78.11) ; v1(119.52,87.13) 119.52,83.911 v1(125.32,78.11) ; v1(126.27,67.101) 126.91,66.462 131.3,66.462 135.77,61.991 v1(135.77,61.321) ; v1(129.971,59.065) 129.971,56.33 131.759,54.542 138.531,54.542 USB1.13@140.495,56.506 ; USB1.14@140.495,65.156 143.81,68.47 H2.1@143.81,83.34 130.55,83.341 v1(125.32,78.11) ; USB1.13@144.695,56.505 USB1.14@144.695,65.155
  Mid-Layer 2 w0.8: C17.2@79.791,63.64 84.541,68.41 91.135,68.41 v1(92.321,69.597) ; v1(86.871,89.131) 86.871,96.682 v1(88.82,98.63) 106.58,98.631 111.681,103.731 117.309,103.731 C18.2@119.781,101.26 ; pad.2@96.141,69.52 99.9,69.52 101.201,68.219 103.149,68.219 105.579,65.791 116.39,65.791 118.521,67.92 v1@118.521,71.481 ; H1.1@110.63,44.701 114.905,48.975 136.924,48.975 ; P1.1@131.81,44.72 136.065,48.975 140.495,48.975 ; H3.1@140.21,44.731 140.495,45.015 USB1.13@140.495,56.506 ; 140.495,48.92 H4.1@143.74,48.921 ; v1@80.611,63.641 ccw(c79.79,63.641) v1@80.611,63.641 ; v1(80.611,85.36) ccw(c79.79,85.36) v1(80.611,85.36)
  Mid-Layer 2 w1.2: v1(92.321,69.597) 96.064,69.597 pad.2@96.14,69.521
  Bottom Layer w0.6: R17.1@95.52,52.977 96.339,52.158 D9.2@97.62,52.158 99.647,52.158 C21.1@100.02,52.531 ; R15.1@95.52,75.317 96.279,74.558 D8.2@97.62,74.558 ; R14.1@95.52,98.077 96.339,97.258 D7.2@97.62,97.258 99.747,97.258 C19.1@100.02,97.53 ; D8.2@97.619,74.557 98.648,74.557 98.92,74.831 C20.1@100.02,74.83 ; 107.12,44.631 107.12,50.622 v1(107.156,50.658) ; H1.1@110.63,44.701 111.291,44.701 115.511,48.921 H4.1@143.74,48.921 ; C34.2@111.26,70.23 111.259,71.27 111.72,71.73 114.42,71.73 114.67,71.481 v1(118.52,71.481) ; C39.1@120.62,83.83 120.673,83.884 R23.1@122.32,83.884 ; C40.1@129.971,58.08 v1(129.971,59.065) 129.971,59.7 131.589,61.321 133.42,61.321 ; 130.398,48.921 131,48.921 131.789,48.132 ; 131.784,48.921 P1.1@131.81,44.72 ; P1.1@131.81,44.719 131.81,48.08 132.651,48.921 H4.1@143.74,48.921 ; 131.82,61.321 132.359,61.321 132.89,60.79 ; U13.2@132.89,59.232 132.89,60.79 ; v1(135.77,61.321) 133.42,61.321 ; 138.618,48.921 139.229,48.921 140.21,47.94 140.21,48.921 ; H3.1@140.21,44.731 140.21,47.871 141.259,48.921 H4.1@143.74,48.921 ; 132.89,60.79 133.42,61.321
  Bottom Layer w0.8: C17.2@79.79,63.64 86.239,63.641 Q5.3@86.874,63.005 ; C16.2@79.79,85.36 80.145,85.006 Q3.3@86.875,85.005 ; Q3.1@84.335,85.005 84.335,86.595 v1(86.871,89.131) ; v1(88.82,54.431) 90.273,52.977 R17.1@95.52,52.977 ; v1@88.821,76.431 93.421,76.431 94.533,75.316 R15.1@95.521,75.316 ; v1(88.82,98.63) 89.373,98.077 R14.1@95.52,98.077 ; C21.1@100.02,52.531 100.02,47.83 103.15,44.701 H1.1@110.63,44.701 108.35,44.701 107.156,45.894 ; 104.809,44.631 105.893,44.631 107.156,45.894 ; v1(107.156,50.658) 107.156,45.894 ; C33.2@118.42,85.93 C29.2@120.62,85.93 C39.1@120.62,83.83 ; 119.519,85.931 119.52,85.932 v1(119.52,87.13) ; v1(126.27,67.101) 126.27,65.87 C35.2@126.33,65.811 ; C35.2@126.33,65.811 126.329,64.249 125.874,63.795 125.874,62.72 126.7,62.72 127.36,63.381 C32.2@128.39,63.381 ; C41.1@135.77,58.07 v1(135.77,61.321) ; v1@80.611,63.641 ccw(c79.79,63.641) v1@80.611,63.641 ; v1(80.611,85.36) ccw(c79.79,85.36) v1(80.611,85.36)
  Bottom Layer w1: C18.2@119.78,101.26 123.212,97.828 v1(125.569,97.828) 125.569,92.38 132.699,85.25 134.579,85.25 137.81,82.022 D10.2@137.81,79.623 136.072,79.624 135.739,79.291 R19.1@135.74,78.784 ; D10.2@137.81,79.623 139.737,79.623 C22.1@140.07,79.29
  Bottom Layer w1.2: pad.2@96.141,69.52 96.141,72.04 97.619,73.52 D8.2@97.619,74.557 ; U11.3@134.58,94.649 U11.6@134.58,85.251 ; U11.5@137.979,94.65 137.98,88.651 U11.6@134.58,85.251 ; H2.1@143.81,83.34 136.491,83.341 U11.6@134.58,85.251
  Bottom Layer w2: v1(125.569,97.828) D11.2@125.57,99.58
  other v1: 79.38,62.948 80.18,62.948 78.98,63.641 80.58,63.641 79.38,64.333 80.18,64.333 95.449,68.291 96.849,68.291 94.749,69.504 97.549,69.503 95.449,70.716 96.849,70.716 80.193,84.645 79.372,84.653 78.968,85.36 79.372,86.067 80.193,86.076
HO1: R1.1 U7.3 | length 4.7
  Top Layer w0.6: R1.1@98.22,100.73 99.92,100.73 101.055,99.595 U7.3@102.447,99.595
HO2: R4.1 U8.3 | length 4.5
  Top Layer w0.6: R4.1@98.282,78.83 99.92,78.832 100.774,77.976 U8.3@102.447,77.975
HO3: R5.1 U9.3 | length 4.6
  Top Layer w0.6: R5.1@98.282,56.73 99.62,56.73 100.555,55.796 U9.3@102.447,55.796